# EAGLE board Box_Light (EAGLE 6.5.0)
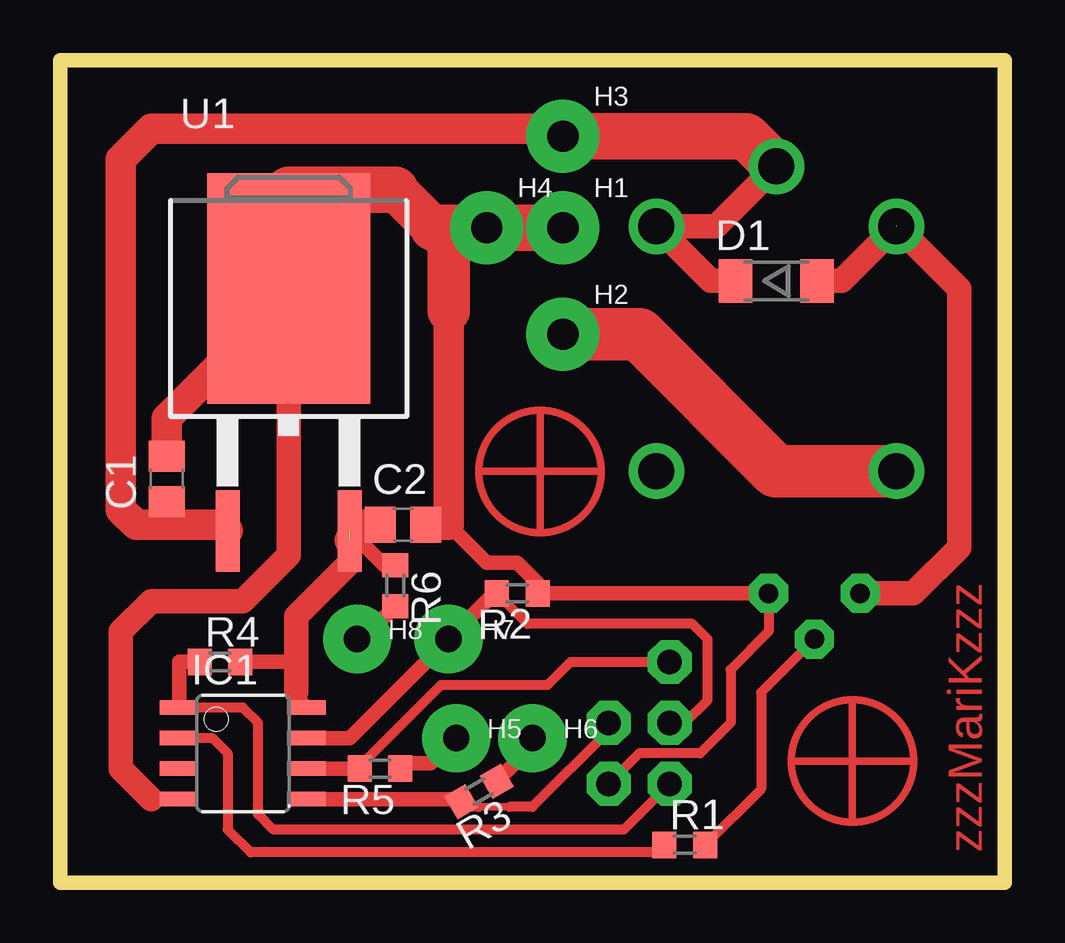
[diagram p0: board, top side]
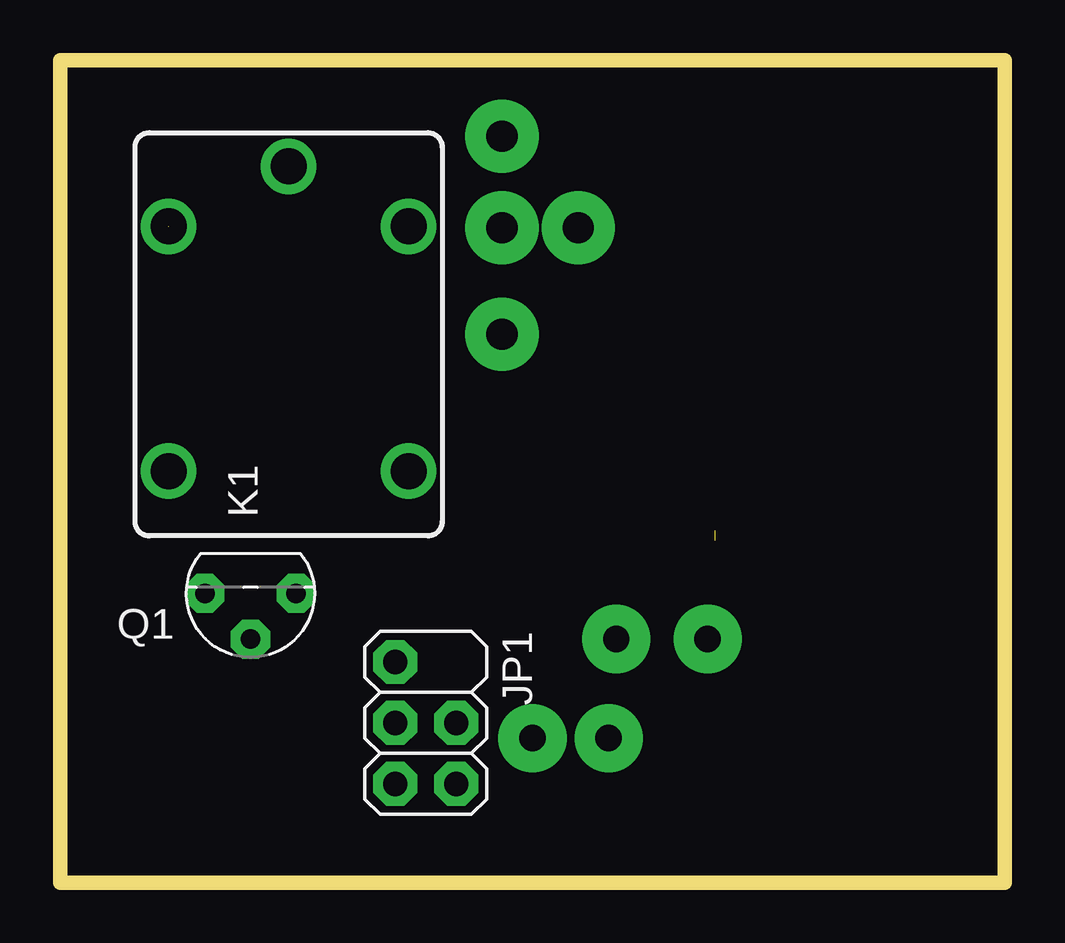
[diagram p1: board, bottom side, seen from below]

Size 39.37 x 34.29 mm. Coordinates in mm from the lower left corner, seen from the top.
Outline: 0,34.29 39.37,34.29 39.37,0 0,0 0,34.29
Copper layers (1*16): Top 0.035mm / dielectric 1.5mm / Bottom 0.035mm
Design rules "default": minimum track width 12mil, minimum drill 32mil, track to track 12mil, track to pad 12mil, pad to pad 12mil, via to via 12mil, smd to smd 8mil, copper to edge 40mil, drill to drill 8mil, minimum pad ring 16mil, minimum via ring 12mil, stop-mask expansion 4mil, vias tented up to drill 0mil, thermal gap 20mil

## Footprints (pad centres in the part's own frame; a part is rotated, then mirrored left to right if it is on the bottom)
C0805 = smd 1.3 x 1.5: 1 -0.95,0; 2 0.95,0
SOD80 = smd 1.4 x 1.8: 1 -1.7,0; 2 1.7,0
3,0 = drill 1.3 pad 3.048: P$1 0,0
2,8 = drill 1.1 pad 2.845: P$1 0,0
8S1 = smd 0.6 x 1.6: 1 -1.905,-2.654; 2 -0.645,-2.654; 3 0.625,-2.654; 4 1.895,-2.654; 5 1.905,2.654; 6 0.635,2.654; 7 -0.635,2.654; 8 -1.905,2.654
2X2.5 = drill 1.016 octagon: 1 -2.54,-1.27; 3 0,-1.27; 4 0,1.27; 5 2.54,-1.27; 6 2.54,1.27
CQ1 = drill 1.5: 1 4.5,-5; 2 4.5,5; C 7,0; NC -5.7,-5; NO -5.7,5
TO92 = drill 0.813 octagon: 1 1.905,0; 2 0,1.905; 3 -1.905,0
R0603 = smd 1 x 1.1: 1 -0.85,0; 2 0.85,0
TO263 = smd 1 x 3.4: 1 -2.54,-6.6; 2 2.54,-6.6 | smd 6.8 x 9.6: 3 0,3.5

## Placement (x,y rotation side)
C1  330nf  [C0805]  4.45,16.83 90 top
C2  100nf  [C0805]  14.29,14.92 0 top
D1  DIODE  [SOD80]  29.84,25.08 0 top
H1  Light -  [3,0]  20.95,27.3 0 top
H2  Light +  [3,0]  20.95,22.86 0 top
H3  +12V  [3,0]  20.95,31.11 0 top
H4  GND  [3,0]  17.78,27.3 0 top
H5  Door 2  [2,8]  16.51,6.03 0 top
H6  Door 1  [2,8]  19.68,6.03 0 top
H7  Key-  [2,8]  16.19,10.16 0 top
H8  Key+  [2,8]  12.38,10.16 0 top
IC1  TINY13-20SSU  [8S1]  7.62,5.4 270 top
JP1  [2X2.5]  24.13,6.67 270 bottom
K1  CQ1-12V  [CQ1]  29.84,22.86 90 bottom
Q1  S9014  [TO92]  31.43,12.07 180 bottom
R1  10k  [R0603]  26.04,1.59 0 top
R2  68k  [R0603]  19.05,12.07 180 top
R3  10k  [R0603]  17.46,3.81 210 top
R4  10k  [R0603]  6.67,9.21 0 top
R5  10k  [R0603]  13.34,4.76 180 top
R6  6k8  [R0603]  13.97,12.38 270 top
U1  L7805  [TO263]  9.53,21.27 0 top

## Library data of the parts
C1 C2 R1-R6 = rcl
D1 = usb
H1-H8 = holes
IC1 = atmel; MPN: ATTINY13-20SSU; OC_FARNELL: 1455133; OC_NEWARK: 58M3771
JP1 = pinhead
K1 = relay; OC_FARNELL: unknown; OC_NEWARK: unknown
Q1 = transistor-npn
U1 = v-reg

## Nets
+5V: C2.1 IC1.8 R4.2 R6.1 U1.2
+12V: C1.1 D1.1 H3.P$1 K1.1 K1.C U1.1
GND: C1.2 C2.2 H1.P$1 H4.P$1 IC1.4 JP1.6 Q1.3 R2.1 U1.3
N$1: D1.2 K1.2 Q1.1
N$2: Q1.2 R1.2
N$3: H7.P$1 IC1.7 JP1.3 R2.2
N$4: H5.P$1 R5.1
N$5: IC1.5 JP1.4 R3.2
N$6: IC1.2 R1.1
N$7: IC1.6 JP1.1 R5.2
N$8: IC1.1 JP1.5 R4.1
N$9: H2.P$1 K1.NO
N$10: H6.P$1 R3.1
N$13: H8.P$1 R6.2

## Tracks (layer width: path | path; a pad name or v marks a point on that pad's centre or on a via)
+5V  (1 unrouted)
  Top 0.406: 10.79,7.3 IC1.8
  Top 0.61: 9.84,7.94 9.84,7.73 IC1.8 | R4.2 9.53,9.21 9.84,9.52 | R6.1 13.51,13.23 U1.2
  Top 1.016: 12.06,14.29 12.06,13.34 9.84,11.11 9.84,9.52 9.84,7.94
  Top 1.27: C2.1 12.7,14.92 12.06,14.29
+12V
  Top 1.016: K1.C 27.34,27.36 K1.1 27.12,25.08 D1.1
  Top 1.27: 4.45,14.92 3.17,14.92 2.54,15.56 2.54,30.16 3.81,31.43 20.64,31.43 H3.P$1 | 4.45,14.92 6.74,14.92 U1.1 | C1.1 4.45,14.92
  Top 1.93: H3.P$1 28.59,31.11 K1.C
GND
  Top 0.406: 9.53,22.22 9.53,22.54 U1.3 | JP1.6 24.13,5.4 26.67,5.4 27.94,6.67 27.94,8.89 29.53,10.48 Q1.3
  Top 0.61: 3.81,3.49 4.96,3.49 IC1.4 | 16.51,14.6 16.51,14.92 16.19,14.92 17.78,13.34 19.05,13.34 19.9,12.49 R2.1 Q1.3
  Top 1.016: 3.81,3.49 2.54,4.76 2.54,10.48 3.81,11.75 7.62,11.75 9.53,13.65 9.53,22.22 | 9.21,22.22 9.53,22.54
  Top 1.27: C2.2 16.19,14.92 16.19,23.81 | C1.2 4.45,19.37 6.99,21.91 8.89,21.91 9.21,22.22
  Top 1.778: 13.97,28.89 15.56,27.31 16.19,26.67 16.19,23.81
  Top 1.93: U1.3 9.53,28.89 13.97,28.89 | 15.56,27.31 H4.P$1 H1.P$1
N$1  (1 unrouted)
  Top 1.016: Q1.1 35.56,12.07 37.47,13.97 37.47,24.77 34.86,27.37 | D1.2 32.57,25.08 K1.2
N$2
  Top 0.406: Q1.2 29.21,7.94 29.21,3.91 R1.2
N$3
  Top 0.406: R2.2 19.47,10.79 26.35,10.79 26.99,10.16 26.99,7.62 26.04,6.67 JP1.3
  Top 0.61: R2.2 18.1,12.07 H7.P$1 12.06,6.03 IC1.7
N$4
  Top 0.61: R5.1 14.19,4.98 15.46,4.98 H5.P$1
N$5
  Top 0.305: 18.73,3.17 17.46,3.17
  Top 0.406: JP1.4 22.86,6.35 19.68,3.17 18.73,3.17 | 17.46,3.17 16.94,3.17 R3.2
  Top 0.61: IC1.5 16.62,3.49 R3.2
N$6
  Top 0.406: IC1.2 6.34,6.04 6.99,5.4 6.99,2.22 7.94,1.27 25.18,1.27 R1.1
N$7
  Top 0.406: R5.2 12.48,4.87 15.88,8.26 20.32,8.26 21.27,9.21 JP1.1
  Top 0.61: IC1.6 R5.2
N$8
  Top 0.406: IC1.1 7.62,7.3 8.26,6.67 8.26,2.86 8.89,2.22 23.5,2.22 JP1.5
  Top 0.61: R4.1 4.97,9.21 IC1.1
N$9
  Top 2.184: K1.NO 29.83,17.16 24.13,22.86 H2.P$1
N$10
  Top 0.61: H6.P$1 19.68,5.72 R3.1
N$11
  Top 0.305: 17.46,17.15 22.54,17.15
N$12
  Top 0.305: 30.48,5.08 33.02,5.08 | 35.56,5.08 33.02,5.08 | 33.02,5.08 33.02,7.62 | 33.02,5.08 33.02,2.54
N$13
  Top 0.61: H8.P$1 12.6,10.16 R6.2
N$14
  Top 0.305: 20,19.68 20,14.6
(copper drawn outside any net)
  shapes: Top circle x2

## Text on the board
Top: zzzMariKzzz